# Altium PCB Pmod_DA4.PcbDoc
Units mm, origin at the board's own origin, x right, y up, seen from the top; angles counter-clockwise.
Board outline 30 x 20 mm, 2 copper layers (Top Layer, Bottom Layer); 6 components, 7 nets, 32 pads, 2 vias.
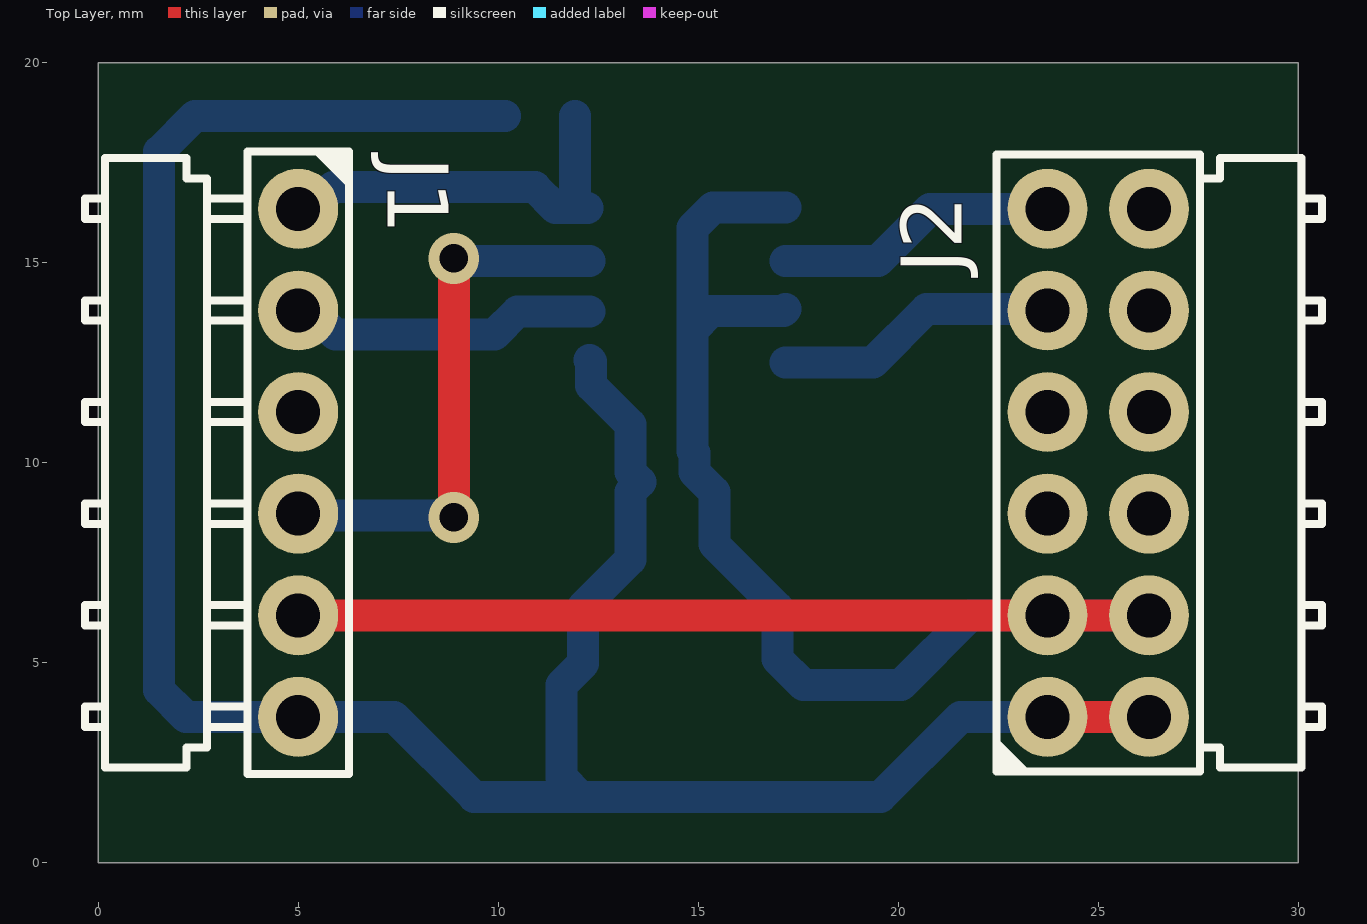
[diagram p0: Top Layer view]
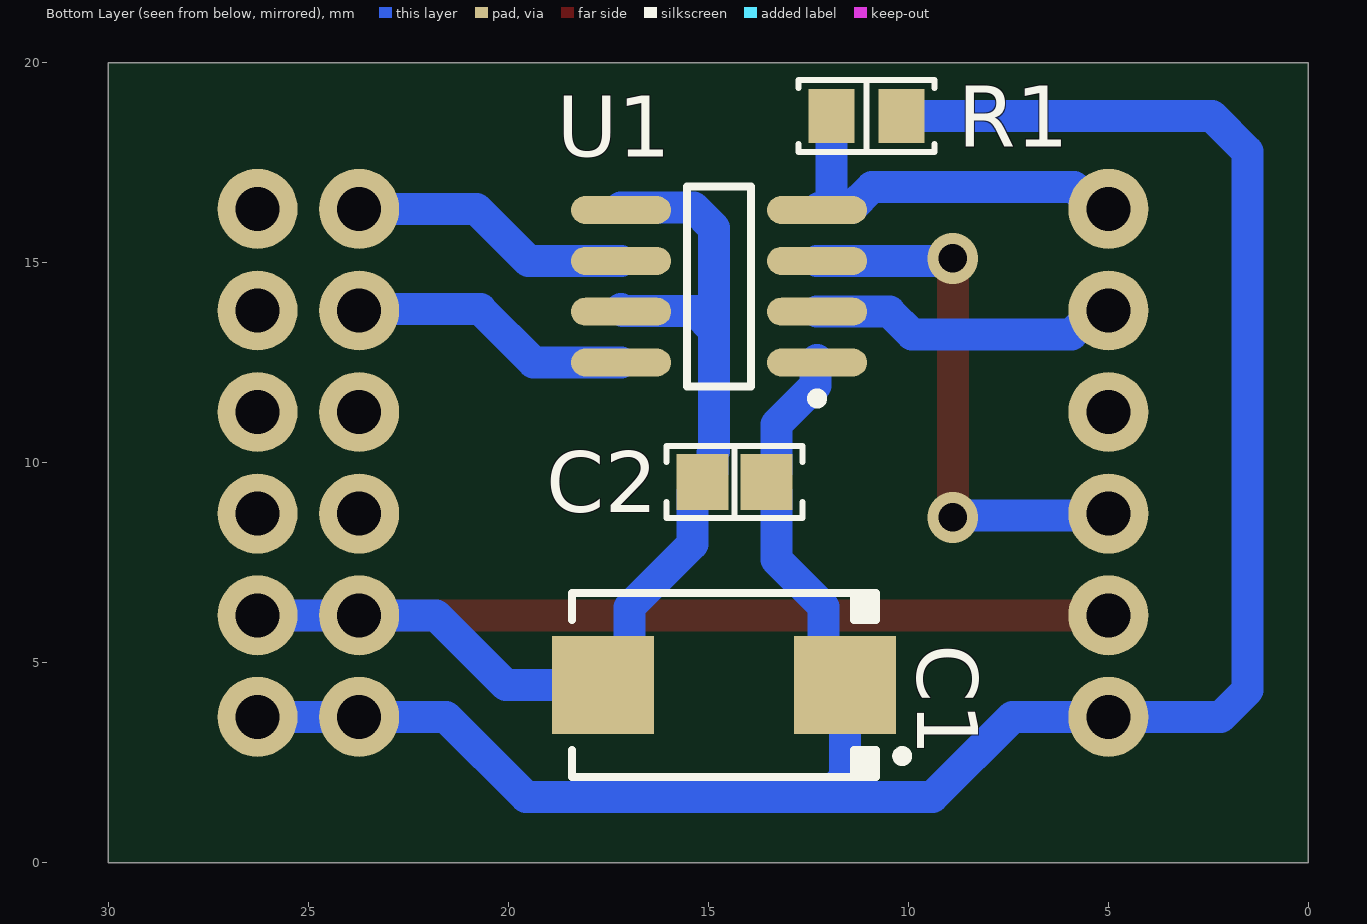
[diagram p1: Bottom Layer view, seen from below]
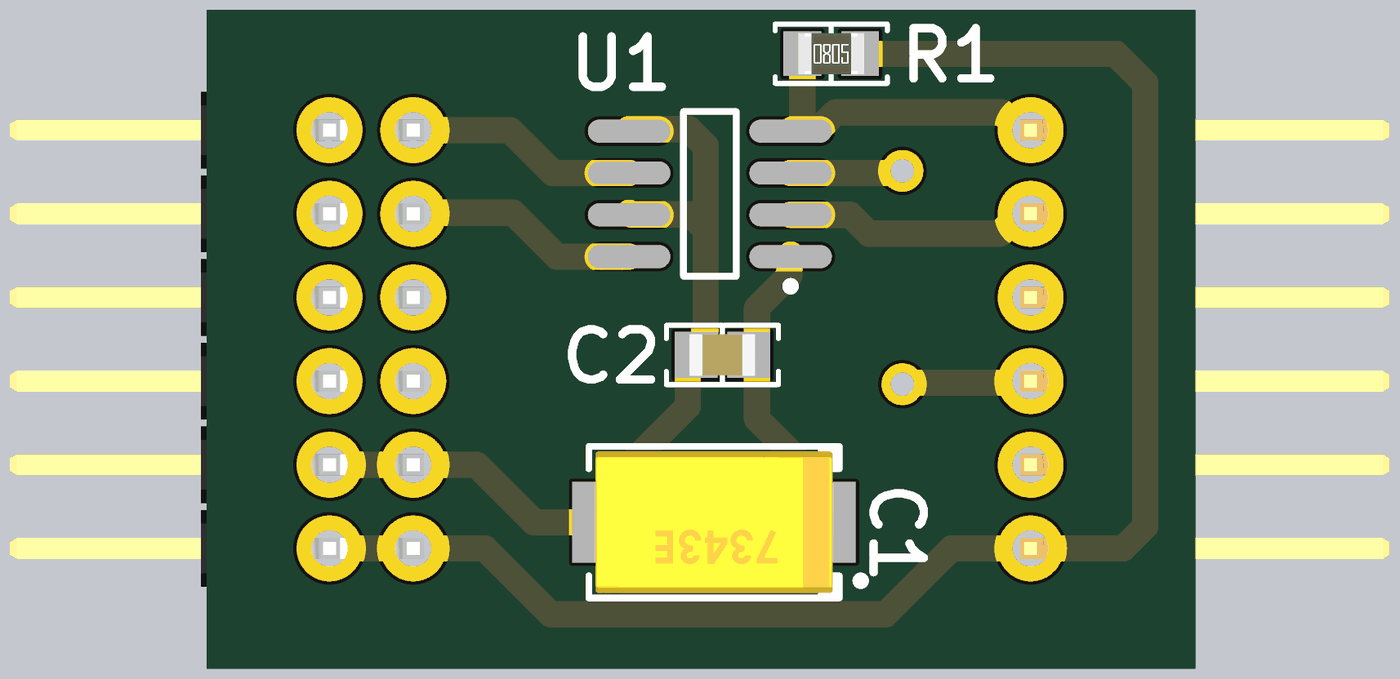
[diagram p2: 3D render of the assembled board from below, using the file's embedded part models]

## Layer stack, top to bottom
Top Solder: solder mask 0.0102, Solder Resist, Dk 3.5
Top Layer: signal copper 0.0356
Dielectric 1: dielectric 0.32, FR-4, Dk 4.8
Bottom Layer: signal copper 0.0356
Bottom Solder: solder mask 0.0102, Solder Resist, Dk 3.5

## Board outline
0,0 0,20 30,20 30,0

## Design rules (kind name [scope] priority, off if disabled: settings)
Clearance [All] p1: gap=0.254 ignorepadtopadclearanceinfootprint=FALSE except(0: Arc-Hole Track-Hole SMDPad-Hole THPad-Hole Via-Hole Fill-Hole Poly-Hole Region-Hole Text-Hole)
PolygonConnect [All] p1: connectstyle=Relief reliefconductorwidth=0.254 reliefentries=4 polygonreliefangle="90 Angle" airgapwidth=0.254
RoutingVias [All] p1: holewidth=0.711 width=1.27 viastyle="Through Hole" minholewidth=0.711 minwidth=1.27 maxholewidth=0.711 maxwidth=1.27
SolderMaskExpansion [All] p1: expansion=0.102 istentingtop=FALSE
Width [All] p1: maxlimit=0.8 minlimit=0.254 preferedwidth=0.8
30 further rules are at their usual default settings.

## Components (designator, comment, footprint, x,y, rotation, side; value= is the part's Value field where it differs from the comment)
C1 "10 µF" "CAP POL 2917_7343" 14.605,4.445 r0 bottom
C2 "0.1 µF" "CAP 0805_2012" 14.351,9.525 r180 bottom
J1 "M20-9960645" "HARWIN M20-9960645" 5,10 r270 top
J2 "M20-9740646" "HARWIN M20-9740645" 25,10 r90 top
R1 "10 kOhms" "RES 0805_2012" 11.049,18.669 r180 bottom
U1 "MCP4822-E/SN" SOIC-SN8_M 14.732,14.415 r0 bottom

## Footprints (in the part's own frame and the unit in brackets; to place one, negate y for a bottom-side part, rotate by r counter-clockwise, add the part's x,y. Pads: shape width x height; smd on the part's side, far side on the other; paste and mask are expansions set on the pad)
"CAP 0805_2012" [mm] "Chip Capacitor, 2-Leads, Body 2.00x1.20mm, IPC Medium Density"
  rect 1.3x1.4 smd: 1(-0.8,0) 2(0.8,0)
  silkscreen extent -1.7,-0.9 1.7,0.9, body extent -1,-0.64 1,0.64, height 1.26
"CAP POL 2917_7343" [mm] "Molded Capacitor, 2-Leads, Body 7.30x4.30mm, IPC Medium Density"
  rect 2.55x2.45 smd: 1(-3.025,0) 2(3.025,0)
  silkscreen extent -4.57,-2.3 3.8,2.3, body extent -3.65,-2.15 3.65,2.15, height 4.1
"HARWIN M20-9740645" [mm] "2.54mm DIL PC TAIL PIN HEADER ASSEMBLY"
  round 2 hole 1.1: 1(-6.35,1.27) 2(-3.81,1.27) 3(-1.27,1.27) 4(1.27,1.27) 5(3.81,1.27) 6(6.35,1.27) 7(6.35,-1.27) 8(3.81,-1.27) 9(1.27,-1.27) 10(-1.27,-1.27) 11(-3.81,-1.27) 12(-6.35,-1.27)
  silkscreen extent -7.73,-5.59 7.71,2.57, body extent -7.62,-10.97 7.62,1.59, height 5
"HARWIN M20-9960645" [mm] "2.54mm DIL PC TAIL PIN HEADER ASSEMBLY"
  round 2 hole 1.1: 1(-6.35,0) 2(-3.81,0) 3(-1.27,0) 4(1.27,0) 5(3.81,0) 6(6.35,0)
  silkscreen extent -7.78,-5.33 7.78,1.3, body extent -7.62,-10.9 7.62,0.32, height 2.54
"RES 0805_2012" [mm] "Chip Resistor, 2-Leads, Body 2.00x1.25mm, IPC Medium Density"
  rect 1.15x1.35 smd: 1(-0.875,0) 2(0.875,0)
  silkscreen extent -1.7,-0.9 1.7,0.9, body extent -1,-0.62 1,0.63, height 0.6
SOIC-SN8_M [mm] "SOIC, 8-Leads, Body 4.9x3.9mm, Pitch 1.27mm, IPC Low Density"
  oval 2.5x0.7 smd: 1(-2.45,1.905) 2(-2.45,0.635) 3(-2.45,-0.635) 4(-2.45,-1.905) 5(2.45,-1.905) 6(2.45,-0.635) 7(2.45,0.635) 8(2.45,1.905)
  silkscreen extent -2.57,-2.5 0.8,2.93, body extent -2,-2.5 2,2.5, height 1.75

## Part data
C1: library part 293D106X0050E2TE3, "CAP TANT 10UF 20% 50V 2917", Device Package="2917 (7343 Metric)", ESR (Equivalent Series Resistance)=800mOhm, manufacturer="Vishay Sprague", Manufacturer Size Code=E, Operating Temperature="-55°C ~ 125°C", Supplier Part Number 1=718-1957-1-ND, Tolerance=±20%, Voltage - Rated="50 V", Capacitance="10 µF", componentlink1description=Datasheet, componentlink1url=http://www.vishay.com/docs/40002/293d.pdf, componentlink2description="DigiKey Link", componentlink2url=https://www.digikey.com/en/products/detail/vishay-sprague/293D106X0050E2TE3/1578612, Features="General Purpose", Height - Seated (Max)="0.170\" (4.32mm)", lastupdated="13.07.2023 19:40:38", Lifecycle Status=Active, Minimum Order=1, Mounting Type="Surface Mount", Package / Case="2917 (7343 Metric)", packaging=TapeAndReel, Part Number=293D106X0050E2TE3, Part Status=Active, partid=653, price=0.65, series="TANTAMOUNT®, 293D", Size / Dimension="0.287\" L x 0.169\" W (7.30mm x 4.30mm)", Supplier 1=DigiKey, Type=Molded
C2: library part CC0805MRX7R9BB104, "CAP CER 0.1UF 50V X7R 0805", Device Package="0805 (2012 Metric)", manufacturer=Yageo, Operating Temperature="-55°C ~ 125°C", Supplier Part Number 1=311-4351-1-ND, Temperature Coefficient=X7R, Tolerance=±20%, Voltage - Rated=50V, Applications="General Purpose", Capacitance="0.1 µF", componentlink1description=Datasheet, componentlink1url=https://www.yageo.com/upload/media/product/productsearch/datasheet/mlcc/UPY-GPHC_X7R_6.3V-to-50V_18.pdf, componentlink2description="DigiKey Link", componentlink2url=https://www.digikey.com/en/products/detail/yageo/CC0805MRX7R9BB104/5884281, lastupdated="15.07.2023 19:12:08", Lifecycle Status=Active, Minimum Order=1, Mounting Type="Surface Mount, MLCC", Package / Case="0805 (2012 Metric)", packaging=TapeAndReel, Part Number=CC0805MRX7R9BB104, Part Status=Active, partid=2475, price=0.01, series=CC, Size / Dimension="0.079\" L x 0.049\" W (2.00mm x 1.25mm)", Supplier 1=DigiKey, Thickness (Max)="0.037\" (0.95mm)"
J1: "CONN HEADER R/A 6POS 2.54MM", Current Rating (Amps)="3A per Contact", manufacturer="Harwin Inc.", Material Flammability Rating="UL94 V-0", Operating Temperature="-40°C ~ 105°C", Supplier Part Number 1=952-2247-ND, Insulation Color=Black, componentlink1description=Datasheet, componentlink1url=https://cdn.harwin.com/pdfs/Harwin_PC_Connectors_M20.pdf, componentlink2description="DigiKey Link", componentlink2url=https://www.digikey.com/en/products/detail/harwin-inc/M20-9960645/3728211, Connector Type="Header, Cuttable", Contact Finish - Mating=Gold, Contact Length - Mating="0.240\" (6.10mm)", Contact Length - Post="0.118\" (3.00mm)", Contact Material=Brass, Contact Shape=Square, Contact Type="Male Pin", Fastening Type=Push-Pull, lastupdated="21.09.2022 19:23:50", Lifecycle Status=Active, Minimum Order=1, Mounting Type="Through Hole, Right Angle", Number of Positions=6, Number of Positions Loaded=All, Number of Rows=1, packaging=Bulk, Part Number=M20-9960645, Part Status=Active, partid=169, Pitch - Mating="0.100\" (2.54mm)", price=0.16, Row Spacing - Mating="-40°C ~ 105°C", series=M20, Shrouding=Unshrouded, Style="Board to Board or Cable", Supplier 1=DigiKey, Termination=Solder, Insulation Height="0.100\" (2.54mm)", Insulation Material="Polyamide (PA6T), Nylon 6T"
J2: "CONN HEADER R/A 12POS 2.54MM", Current Rating (Amps)="3A per Contact", manufacturer="Harwin Inc.", Material Flammability Rating="UL94 V-0", Operating Temperature="-40°C ~ 105°C", Supplier Part Number 1=M20-9740646-ND, Insulation Color=Black, componentlink1description=Datasheet, componentlink1url=https://cdn.harwin.com/pdfs/M20-974.pdf, componentlink2description="DigiKey Link", componentlink2url=http://digikey.com/product-detail/en/harwin-inc/M20-9740646/M20-9740646-ND/3920719, Connector Type="Header, Cuttable", Contact Finish - Mating=Tin, Contact Finish - Post=Tin, Contact Material=Brass, Contact Shape=Square, Contact Type="Male Pin", Fastening Type=Push-Pull, lastupdated="21.09.2022 19:18:29", Lifecycle Status=Active, Minimum Order=1500, Mounting Type="Through Hole, Right Angle", Number of Positions=12, Number of Positions Loaded=All, Number of Rows=2, packaging=Bulk, Part Number=M20-9740646, Part Status=Active, partid=159, price=0.27, series=M20, Shrouding=Unshrouded, Style="Board to Board or Cable", Supplier 1=DigiKey, Termination=Solder, Insulation Material="Polyamide (PA6T), Nylon 6T"
R1: library part TNPU080510K0AWEN00, "TNPU0805 10K 0.05% 2PPM E52 E3", Device Package="0805 (2012 Metric)", manufacturer="Vishay Dale", Operating Temperature="-55°C ~ 125°C", Power (Watts)="0.125W, 1/8W", Ratings=AEC-Q200, Supplier Device Package=0805, Supplier Part Number 1=541-TNPU080510K0AWEN00CT-ND, Temperature Coefficient=±2ppm/°C, Tolerance=±0.05%, componentlink2description="DigiKey Link", componentlink2url=https://www.digikey.com/en/products/detail/vishay-dale/TNPU080510K0AWEN00/11618047, Composition="Thin Film", Features="Anti-Sulfur, Automotive AEC-Q200, Moisture Resistant", Height - Seated (Max)="0.022\" (0.55mm)", lastupdated="19.07.2023 19:10:50", Lifecycle Status=Active, Minimum Order=1, Number of Terminations=2, Package / Case="0805 (2012 Metric)", packaging=TapeAndReel, Part Number=TNPU080510K0AWEN00, Part Status=Active, partid=61852, price=2.39, Resistance="10 kOhms", series="TNPU e3", Size / Dimension="0.079\" L x 0.049\" W (2.00mm x 1.25mm)", Supplier 1=DigiKey
U1: library part CMP-0188-00505-2, "12-Bit DACs with Internal VREF and SPI Interface, 8-Pin SOIC 150mil, Extended Temperature", Code_JEDEC=MS-012, Code_IPC=SOIC127P600-8, componentlink1description="Manufacturer URL", componentlink1url=http://www.microchip.com/, componentlink2description=Datasheet, componentlink2url=http://ww1.microchip.com/downloads/en/DeviceDoc/22249A.pdf, ComponentLink3Description="Package Specification", ComponentLink3URL=http://www.microchip.com/stellent/groups/techpub_sg/documents/packagingspec/en012702.pdf, DatasheetVersion="revA, Apr-2010", PackageDescription="8-Lead Plastic Small Outline (SN) - Narrow, 3.90mm Body [SOIC]", PackageReference=SOIC-SN8, PackageVersion="revBB, Aug-2009", RevisionNote="URLs added. DatasheetVersion updated. Sch updated."

## Via types
v1: diameter 1.27, hole 0.711, Top Layer to Bottom Layer, 2 vias

## Nets (pads, with @x,y where several pads share a name; then routed paths per layer and width w, separated by ;. In a path a pad name is that pad's centre, name@x,y a point inside that pad or via, vN(x,y) a via of type N, cw(c..) or ccw(c..) an arc to the next point about the centre after c; other vN are vias at no path point)
GND: C1.2 C2.1 J1.5 J2.2 J2.11 U1.5 U1.7 | length 48.3
  Top Layer w0.8: J1.5 J2.2 J2.11
  Bottom Layer w0.8: U1.7@17.182,13.843 17.132,13.793 15.328,13.793 14.859,13.324 ; U1.5@17.182,16.383 15.367,16.383 14.859,15.875 14.859,13.324 ; J2.11 J2.2 21.811,6.19 20.066,4.445 C1.2 16.978,5.097 16.978,6.39 15.401,7.967 15.401,9.275 14.901,9.775 14.901,10.252 14.859,10.294 14.859,13.324
NetJ1_1: J1.1 R1.1 U1.4 | length 10
  Bottom Layer w0.8: J1.1 5.325,16.35 5.866,16.891 10.913,16.891 11.432,16.372 11.432,16.37 U1.4@11.924,16.37 ; R1.1 U1.4@11.924,16.37 ; U1.4@12.232,16.37 U1.4@11.924,16.37
NetJ1_2: J1.2 U1.2 | length 7.8
  Bottom Layer w0.8: J1.2 5.325,13.81 5.927,13.208 9.906,13.208 10.478,13.78 U1.2
NetJ1_4: J1.4 U1.3 | length 13.7
  Top Layer w0.8: v1(8.89,8.636) v1(8.89,15.113)
  Bottom Layer w0.8: J1.4 5.047,8.683 8.843,8.683 v1(8.89,8.636) ; v1@9.017,14.986 9.081,15.05 U1.3
NetJ2_5: J2.5 U1.8 | length 7.1
  Bottom Layer w0.8: U1.8 19.368,12.51 20.701,13.843 23.697,13.843 J2.5
NetJ2_6: J2.6 U1.6 | length 7.1
  Bottom Layer w0.8: U1.6 19.495,15.05 20.795,16.35 J2.6
VCC: C1.1 C2.2 J1.6 J2.1 J2.12 R1.2 U1.1 | length 64.2
  Top Layer w0.8: J2.1 J2.12
  Bottom Layer w0.8: R1.2 2.413,18.669 1.524,17.78 1.524,4.318 2.192,3.65 J1.6 7.399,3.65 9.398,1.651 12.065,1.651 ; U1.1@12.282,12.573 12.319,12.536 12.319,11.938 13.301,10.956 13.301,9.775 C2.2 13.301,9.275 13.301,7.586 12.116,6.401 12.116,4.981 C1.1 11.58,2.136 12.065,1.651 ; J2.12 J2.1 21.557,3.65 19.558,1.651 12.065,1.651
pads on no net: J1.3 J2.3 J2.4 J2.7 J2.8 J2.9 J2.10